# Altium PCB 2541PCB2.PcbDoc
Units mil, origin at the board's own origin, x right, y up, seen from the top; angles counter-clockwise.
Board outline 12300 x 4000 mil, 2 copper layers (Top Layer, Bottom Layer); 65 components, 57 nets, 236 pads, 16 vias.
Unrouted connection lines stored in the file: 169.
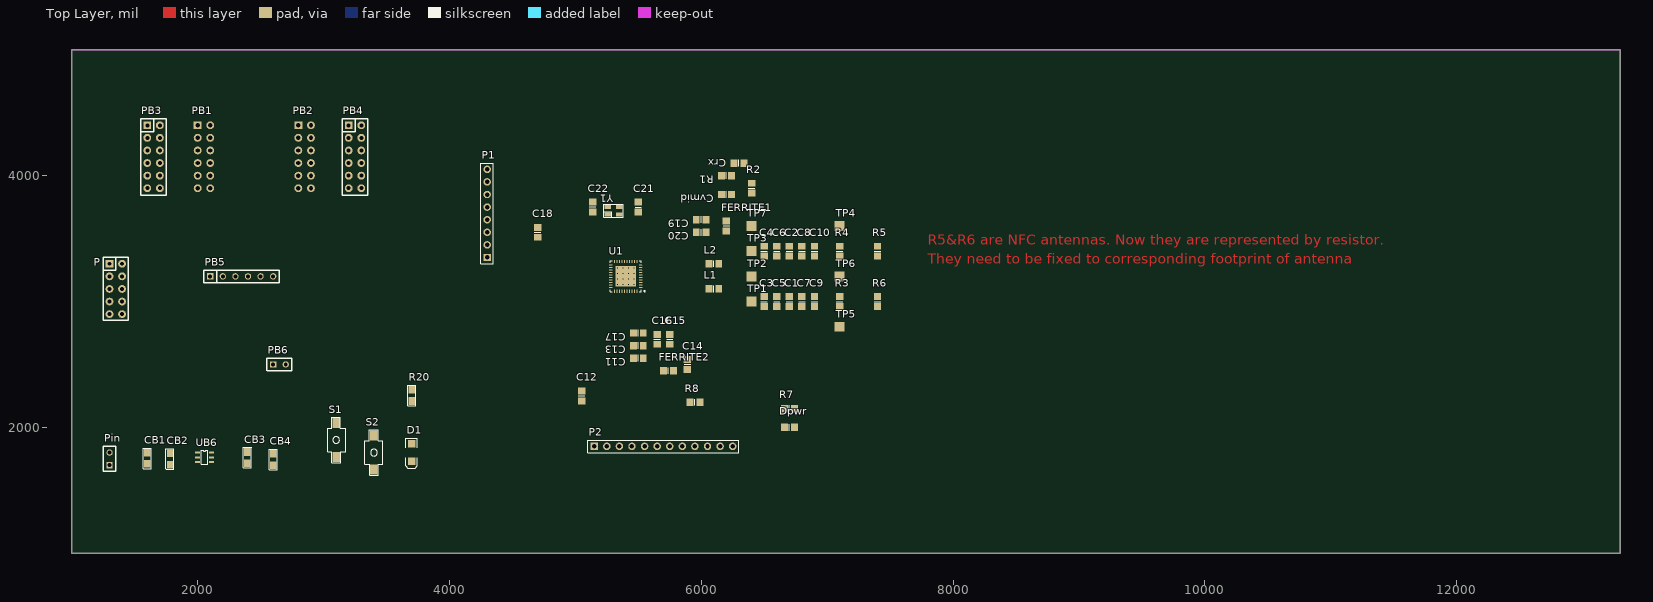
[diagram p0: Top Layer view]
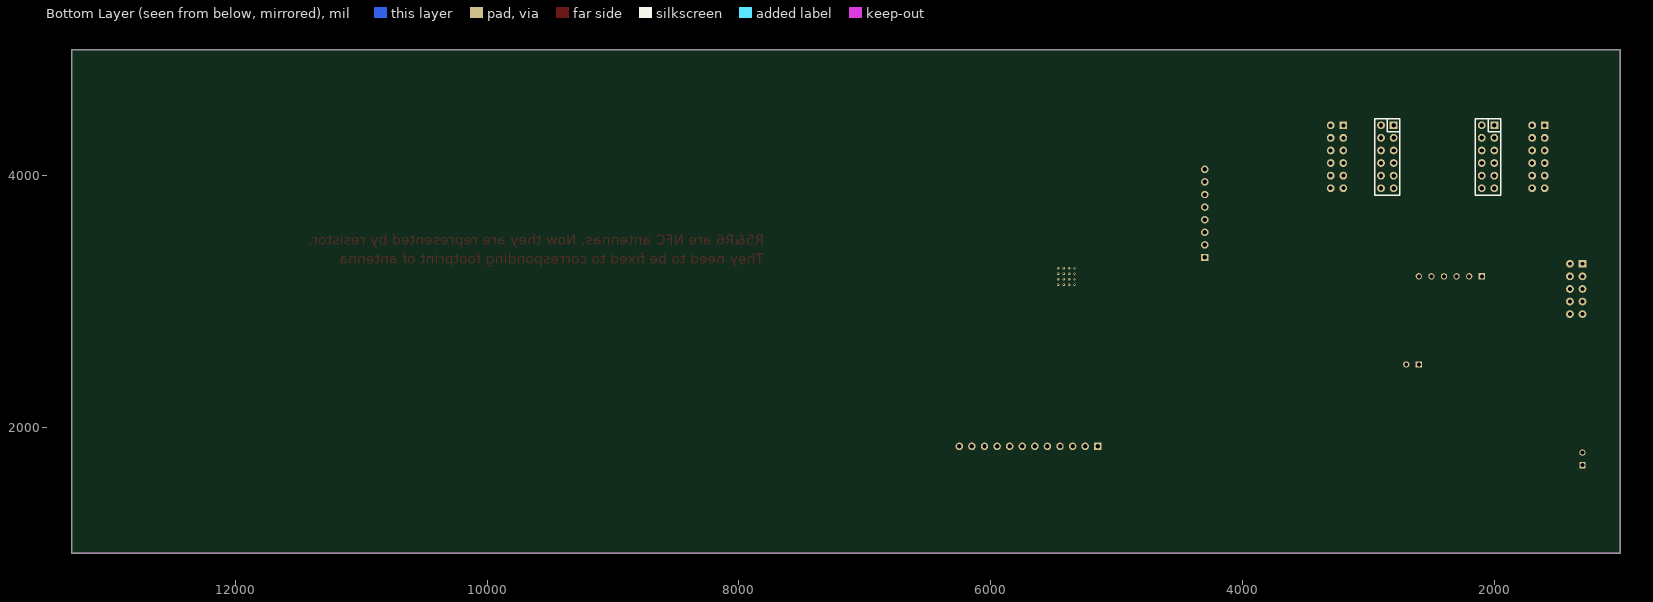
[diagram p1: Bottom Layer view, seen from below]

## Layer stack, top to bottom
Top Solder: solder mask 0.4, Solder Resist, Dk 3.5
Top Layer: signal copper 1.4
Dielectric 1: dielectric 12.6, FR-4, Dk 4.8
Bottom Layer: signal copper 1.4
Bottom Solder: solder mask 0.4, Solder Resist, Dk 3.5

## Board outline
1000,1000 1000,5000 13300,5000 13300,1000

## Design rules (kind name [scope] priority, off if disabled: settings)
Clearance [All] p1: gap=10
PolygonConnect [All] p1: connectstyle=Relief reliefconductorwidth=10 reliefentries=4 polygonreliefangle="90 Angle" airgapwidth=10
RoutingVias [All] p1: holewidth=28 width=50 viastyle="Through Hole" minholewidth=28 minwidth=50 maxholewidth=28 maxwidth=50
SolderMaskExpansion [All] p1: expansion=4
Width [All] p1: maxlimit=10 minlimit=10 preferedwidth=10
29 further rules are at their usual default settings.

## Components (designator, comment, footprint, x,y, rotation, side; value= is the part's Value field where it differs from the comment)
C1 "Cap" 6-0805_M 6700,3000 r270 top
C2 "Cap" 6-0805_M 6700,3400 r270 top
C3 "Cap" 6-0805_M 6500,3000 r90 top
C4 "Cap" 6-0805_M 6500,3400 r90 top
C5 "Cap" 6-0805_M 6600,3000 r270 top
C6 "Cap" 6-0805_M 6600,3400 r270 top
C7 "Cap" 6-0805_M 6800,3000 r270 top
C8 "Cap" 6-0805_M 6800,3400 r270 top
C9 "Cap" 6-0805_M 6900,3000 r270 top
C10 "Cap" 6-0805_M 6900,3400 r270 top
C11 "Cap" 6-0805_M 5500,2550 r180 top
C12 "Cap" 6-0805_M 5050,2250 r270 top
C13 "Cap" 6-0805_M 5500,2650 r180 top
C14 "Cap" 6-0805_M 5889.37,2500 r270 top
C15 "Cap" 6-0805_M 5750,2700 r270 top
C16 "Cap" 6-0805_M 5650,2700 r270 top
C17 "Cap" 6-0805_M 5500,2750 r180 top
C18 "Cap" 6-0805_M 4700,3550 r90 top
C19 "Cap" 6-0805_M 6000,3650 r180 top
C20 "Cap" 6-0805_M 6000,3550 r180 top
C21 "Cap" 6-0805_M 5500,3750 r270 top
C22 "Cap" 6-0805_M 5137.8,3751.18 r90 top
CB1 "Cap Pol1" 0805-SMALL 1600,1800 r270 top
CB2 "Cap" 0805-SMALL 1780,1705 r90 top
CB3 "Cap Pol1" 0805-SMALL 2395,1805 r270 top
CB4 "Cap" 0805-SMALL 2600,1700 r90 top
Crx "Cap" 6-0805_M 6300,4100 r0 top
Cvmid "Cap" 6-0805_M 6200,3850 r180 top
D1 "LED1-green" 3.2X1.6X1.1 3700,1800 r270 top
Dpwr "LED2" 6-0805_M 6700,2000 r0 top
FERRITE1 "Inductor" 6-0805_M 6200,3600 r270 top
FERRITE2 "Inductor" 6-0805_M 5739.37,2450 r180 top
L1 "Inductor" 6-0805_M 6100,3100 r180 top
L2 "Inductor" 6-0805_M 6100,3300 r180 top
P "CCdebugger" M-IDC10 1300,3300 r270 top
P1 "Header 8" HDR1X8 4300,3350 r90 top
P2 "Header 12" HDR1X12 5150,1850 r0 top
PB1 "connector" M-IDC12M 2000,4400 r270 top
PB2 "connector" M-IDC12M 2800,4400 r270 top
PB3 "connector" M-IDC12 1600,4400 r270 top
PB4 "connector" M-IDC12 3200,4400 r270 top
PB5 "OLED" M-SIP6 2100,3200 r0 top
PB6 "FIX" M-SIP2 2600,2500 r0 top
Pin "Header 2" M-SIP2 1300,1700 r90 top
R1 "Res1" 6-0805_M 6200,4000 r180 top
R2 "Res1" 6-0805_M 6400,3900 r270 top
R3 "Res1" 6-0805_M 7100,3000 r90 top
R4 "Res1" 6-0805_M 7100,3400 r90 top
R5 "Res1" 6-0805_M 7400,3400 r270 top
R6 "Res1" 6-0805_M 7400,3000 r270 top
R7 "Res1" 6-0805_M 6700,2150 r180 top
R8 "Res1" 6-0805_M 5950,2200 r180 top
R20 "Res2" 0805-SMALL 3700,2300 r270 top
S1 "Change" MY-KEY1 3100,1900 r90 top
S2 "Reset" MY-KEY1 3400,1800 r270 top
TP1 "*" PCBComponent_1 6400,3000 r180 top
TP2 "*" PCBComponent_1 6400,3200 r180 top
TP3 "*" PCBComponent_1 6400,3400 r180 top
TP4 "*" PCBComponent_1 7100,3600 r180 top
TP5 "*" PCBComponent_1 7100,2800 r180 top
TP6 "*" PCBComponent_1 7100,3200 r180 top
TP7 "*" PCBComponent_1 6400,3600 r180 top
U1 "*" QFN50P600X600X85_HS-41N 5400,3200 r180 top
UB6 "LDO" SOT23-5 2000,1800 r0 top
Y1 "XTAL" CRYSTAL_3225 5350,3750 r180 top

## Footprints (in the part's own frame and the unit in brackets; to place one, negate y for a bottom-side part, rotate by r counter-clockwise, add the part's x,y. Pads: shape width x height; smd on the part's side, far side on the other; paste and mask are expansions set on the pad)
3.2X1.6X1.1 [mm] "SMT LED; 2 Flat Leads"
  rect 1.5x1.5 smd: 1(-1.75,0) 2(1.75,0)
  silkscreen extent -2.9,-1.15 3.2,1.15
6-0805_M [mm] "Chip Resistor, Body 2.0x1.2mm, IPC Low Density"
  rect 1.4x1.5 smd: 1(-1,0) 2(1,0)
  silkscreen extent 0,-0.65 0,0.65, body extent -1.07,-0.7 1.07,0.7, height 0.7
0805-SMALL [mil]
  rect 60x50 smd: 1(0,0) 2(90,0)
  silkscreen extent -36,-31 127,32
CRYSTAL_3225 [mm]
  rect 1.3x0.8 smd: 1(2.388,1.499) 2(0,0) 3(2.388,0) 4(0,1.498)
  silkscreen extent -0.81,-0.56 3.2,2.06
HDR1X8 [mm] "Connector; Header; 8 Position"
  rect 1.5x1.5 hole 0.9: 1(0,0)
  round 1.5 hole 0.9: 2(2.54,0) 3(5.08,0) 4(7.62,0) 5(10.16,0) 6(12.7,0) 7(15.24,0) 8(17.78,0)
  silkscreen extent -1.27,-1.27 19.05,1.27
HDR1X12 [mm] "Connector; Header; 12 Position"
  rect 1.5x1.5 hole 0.9: 1(0,0)
  round 1.5 hole 0.9: 2(2.54,0) 3(5.08,0) 4(7.62,0) 5(10.16,0) 6(12.7,0) 7(15.24,0) 8(17.78,0) 9(20.32,0) 10(22.86,0) 11(25.4,0) 12(27.94,0)
  silkscreen extent -1.27,-1.27 29.21,1.27
M-IDC10 [mil]
  rect 62x62 hole 31.5: 1(0,0)
  round 62 hole 31.5: 2(0,100) 3(100,0) 4(100,100) 5(200,0) 6(200,100) 7(300,0) 8(300,100) 9(400,0) 10(400,100)
  silkscreen extent -50,-50 450,150
M-IDC12 [mil]
  rect 62x62 hole 31.5: 1(0,0)
  round 62 hole 31.5: 2(0,100) 3(100,0) 4(100,100) 5(200,0) 6(200,100) 7(300,0) 8(300,100) 9(400,0) 10(400,100) 11(500,0) 12(500,100)
  silkscreen extent -50,-50 555,150
M-IDC12M [mil]
  rect 62x62 hole 34.65: 1(0,0)
  round 62 hole 34.65: 2(0,100) 3(100,0) 4(100,100) 5(200,0) 6(200,100) 7(300,0) 8(300,100) 9(400,0) 10(400,100) 11(500,0) 12(500,100)
M-SIP2 [mm]
  rect 1.27x1.27 hole 0.8: 1(0,0)
  round 1.27 hole 0.8: 2(2.54,0)
  silkscreen extent -1.27,-1.24 3.78,1.24
M-SIP6 [mm]
  rect 1.27x1.27 hole 0.8: 1(0,0)
  round 1.27 hole 0.8: 2(2.54,0) 3(5.08,0) 4(7.62,0) 5(10.16,0) 6(12.7,0)
  silkscreen extent -1.27,-1.27 13.97,1.27
MY-KEY1 [mil]
  rect 78.74x59.06 smd: 1(-135,-0.5) 2(135,0.5)
  silkscreen extent -181,-74 180,68
PCBComponent_1 [mm]
  rect 2x2 smd: 1(0,0)
QFN50P600X600X85_HS-41N [mm] "QFN, 40-Leads, Body 6.00x6.00mm, Pitch 0.50mm, Thermal Pad 4.10x4.10mm, IPC Medium Density"
  oval 0.7x0.2 smd: 1(-3,2.25) 2(-3,1.75) 3(-3,1.25) 4(-3,0.75) 5(-3,0.25) 6(-3,-0.25) 7(-3,-0.75) 8(-3,-1.25) 9(-3,-1.75) 10(-3,-2.25) 21(3,-2.25) 22(3,-1.75) 23(3,-1.25) 24(3,-0.75) 25(3,-0.25) 26(3,0.25) 27(3,0.75) 28(3,1.25) 29(3,1.75) 30(3,2.25)
  oval 0.2x0.7 smd: 11(-2.25,-3) 12(-1.75,-3) 13(-1.25,-3) 14(-0.75,-3) 15(-0.25,-3) 16(0.25,-3) 17(0.75,-3) 18(1.25,-3) 19(1.75,-3) 20(2.25,-3) 31(2.25,3) 32(1.75,3) 33(1.25,3) 34(0.75,3) 35(0.25,3) 36(-0.25,3) 37(-0.75,3) 38(-1.25,3) 39(-1.75,3) 40(-2.25,3)
  rect 4.1x4.1 smd: 41(0,0)
  silkscreen extent -3.93,-3.15 3.15,3.15, body extent -3,-3 3,3, height 0.85
SOT23-5 [mm]
  rect 1x0.4 smd: 1(0,0) 2(0,-0.95) 3(0,-1.9) 4(2.8,-1.9) 5(2.8,0) 6(2.8,-0.95)
  silkscreen extent 0.76,-2.38 2.03,0.48

## Part data
C1 C2 C3 C4 C5 C6 C7 C8 C9 C10 C11 C12 C13 C14 C15 C16 C17 C18 C19 C20 C21 C22 CB2 CB4 Crx Cvmid: "Capacitor"
CB1 CB3: "Polarized Capacitor (Radial)"
D1: library part LED2, "Typical RED, GREEN, YELLOW, AMBER GaAs LED"
Dpwr: "Typical RED, GREEN, YELLOW, AMBER GaAs LED"
P1: "Header, 8-Pin"
P2: "Header, 12-Pin"
PB6: library part "Header 2", "Header, 2-Pin"
Pin: "Header, 2-Pin"
R1 R2 R3 R4 R5 R6 R7 R8 R20: "Resistor"
S1 S2: library part SW-SPST, "Single-Pole, Single-Throw Switch"
TP1 TP2 TP3 TP4 TP5 TP6 TP7: library part TESTPOINTPAD
U1: library part PN532
Y1: "Crystal Oscillator"

## Via types
v1: diameter 19.68, hole 7.87, Top Layer to Bottom Layer, 16 vias

## Nets (pads, with @x,y where several pads share a name; then routed paths per layer and width w, separated by ;. In a path a pad name is that pad's centre, name@x,y a point inside that pad or via, vN(x,y) a via of type N, cw(c..) or ccw(c..) an arc to the next point about the centre after c; other vN are vias at no path point)
AUX1: P2.1 U1.12
AUX2: P2.2 U1.13
CS_LED3: P.5 PB1.11 PB3.11
DBG_DC: P.3 PB1.3 PB3.3
DBG_DD: P.4 PB1.4 PB3.4
GND: C3.1 C4.2 C7.1 C8.2 C9.1 C10.2 C11.1 C12.2 C13.1 C14.1 C15.1 C16.1 C17.1 C18.2 C19.1 C20.1 C21.2 C22.2 CB1.2 CB2.1 CB3.2 CB4.1 Cvmid.1 D1.2 P1.8 P2.12 P.1 PB1.1 PB3.1 PB5.1 Pin.1 R5.2 R6.1 R7.2 S2.2 TP2.1 TP6.1 U1.1 U1.3 U1.7 U1.11 U1.16 U1.17 U1.18 U1.41 UB6.2
  other v1: 5335.04,3135.04 5378.35,3135.04 5421.65,3135.04 5464.96,3135.04 5335.04,3178.35 5378.35,3178.35 5421.65,3178.35 5464.96,3178.35 5335.04,3221.65 5378.35,3221.65 5421.65,3221.65 5464.96,3221.65 5335.04,3264.96 5378.35,3264.96 5421.65,3264.96 5464.96,3264.96
GPIO: PB2.2 PB4.2
IRQ: P1.7 U1.25
JOY_LEVEL: PB2.8 PB4.8
JOY_MOVE: PB1.5 PB3.5
LED1: PB2.10 PB4.10 R20.1
LED2: PB2.11 PB4.11
LED4/BOTN1: PB2.3 PB4.3 S1.2
LIGHT_SENSOR: PB2.9 PB4.9
MISO: P.10 PB1.6 PB3.6 PB5.5
MOSI: P.8 PB1.7 PB3.7 PB5.4
MOSI/SDA/TX: P1.4 PB2.4 PB4.4 U1.28
NetC1_1: C1.1 C3.2 C5.1 L1.1 TP1.1
NetC1_2: C1.2 C5.2 C7.2 C9.2 R3.2
NetC2_1: C2.1 C6.1 C8.1 C10.1 R4.1
NetC2_2: C2.2 C4.1 C6.2 L2.1 R2.2 TP3.1 TP7.1
NetC15_2: C15.2 C16.2 FERRITE2.2 U1.5
NetC19_2: C19.2 C20.2 FERRITE1.2 U1.8
NetC21_1: C21.1 U1.14 Y1.1
NetC22_1: C22.1 U1.15 Y1.3
NetCB1_1: CB1.1 CB2.2 Pin.2 UB6.1 UB6.3
NetCrx_1: Crx.1 R1.1 U1.10
NetCrx_2: Crx.2 R2.1
NetCvmid_2: Cvmid.2 R1.2 U1.9
NetD1_1: D1.1 R20.2
NetDpwr_2: Dpwr.2 R7.1
NetL1_2: L1.2 U1.4
NetL2_2: L2.2 U1.6
NetR3_1: R3.1 R6.2 TP5.1
NetR4_2: R4.2 R5.1 TP4.1
NFCMISO: P1.3 U1.29
NSS/SCL/RX: P1.5 PB2.5 PB4.5 U1.27
OLED_DC: PB2.12 PB4.12 PB5.6
P04: PB2.6 PB4.6
P05: PB2.7 PB4.7
P13: PB1.12 PB3.12
P15: P.6 PB1.10 PB3.10 PB5.3
P30/UART_RX: P2.3 U1.24
P31: P2.4 U1.31
P32: P2.5 U1.32
P33: P2.6 U1.33
P34/SIC_CLK: P2.7 U1.34
P35: P2.8 U1.19
RESET: P.7 PB2.1 PB4.1 S2.1
RSTOUT_N: P1.6 U1.26
RSTPD_N: P2.11 R8.2 U1.38
SCK: P1.2 U1.30
SIGIN: P2.10 U1.36
SIGOUT: P2.9 U1.35
USB_M/SDA: PB1.9 PB3.9
USB_P/SCL: PB1.8 PB3.8
VCC: C11.2 C12.1 C13.2 C14.2 C17.2 C18.1 CB3.1 CB4.2 Dpwr.1 FERRITE1.1 FERRITE2.1 P1.1 P.2 P.9 PB1.2 PB3.2 PB5.2 R8.1 S1.1 U1.23 U1.37 U1.39 U1.40 UB6.5
pads on no net: PB6.1 PB6.2 U1.2 U1.20 U1.21 U1.22 UB6.4 UB6.6 Y1.2 Y1.4

## Keep-outs
Keep-Out Layer:
  the board outline again, w7.87

## Other copper
Top Layer:
  text "R5&R6 are NFC antennas. Now they are represented by resistor." at 7800,3450 h80
  text "They need to be fixed to corresponding footprint of antenna" at 7800,3300 h80